# EAGLE board UCirKitUserStudy5-2 (EAGLE 7.3.0)
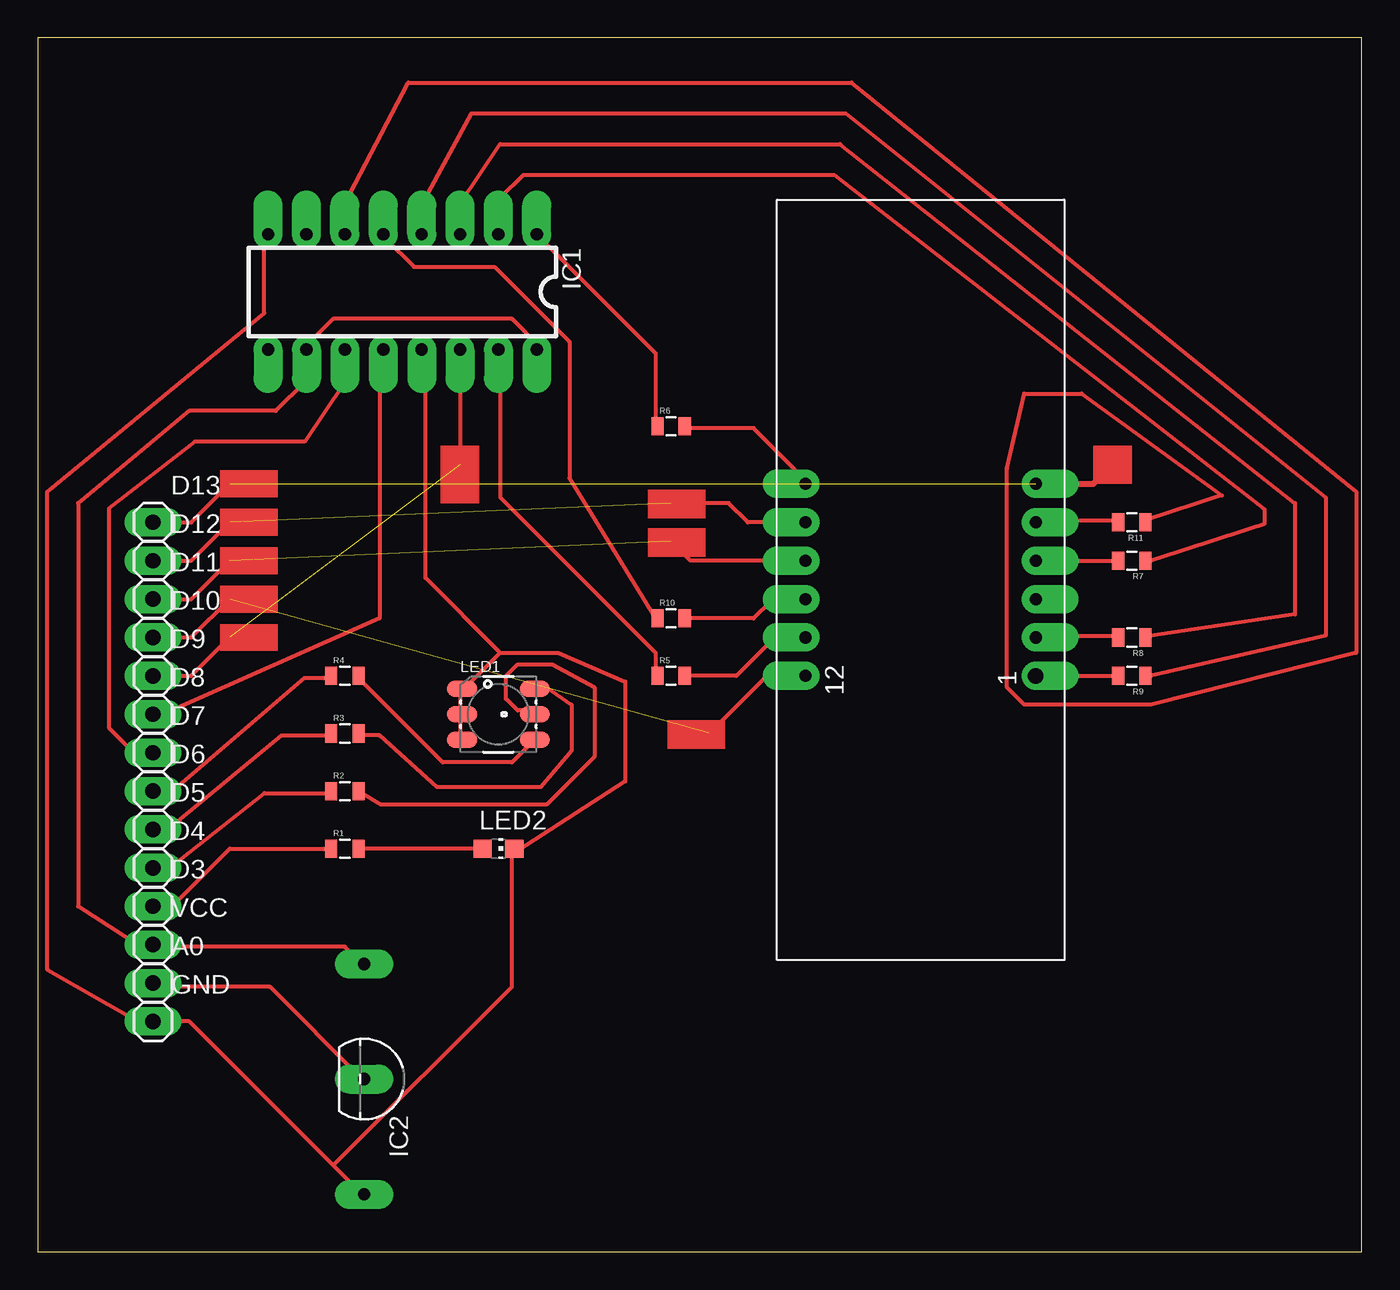
[diagram p0: board, top side]

Size 87.61 x 80.31 mm. Coordinates in mm from the lower left corner, seen from the top.
Outline: 0,0 87.61,0 87.61,80.31 0,80.31 0,0
Copper layers (1*16): Top 0.035mm / dielectric 1.5mm / Bottom 0.035mm
Design rules "default *": minimum track width 10mil, minimum drill 24mil, track to track 20mil, track to pad 30mil, pad to pad 9mil, via to via 9mil, smd to smd 8mil, copper to edge 40mil, drill to drill 8mil, minimum pad ring 10mil, minimum via ring 8mil, stop-mask expansion 4mil, vias tented up to drill 0mil, thermal gap 10mil

## Footprints (pad centres in the part's own frame; a part is rotated, then mirrored left to right if it is on the bottom)
1X01_OVAL_PIN = drill 1.016 pad 1.88 long: 1 0,0
DIL16-OVAL-PIN = drill 0.813 pad 1.93 offset: 1 -8.89,-3.81; 2 -6.35,-3.81; 3 -3.81,-3.81; 4 -1.27,-3.81; 5 1.27,-3.81; 6 3.81,-3.81; 7 6.35,-3.81; 8 8.89,-3.81; 9 8.89,3.81; 10 6.35,3.81; 11 3.81,3.81; 12 1.27,3.81; 13 -1.27,3.81; 14 -3.81,3.81; 15 -6.35,3.81; 16 -8.89,3.81
TO92-EXPANDED-OVAL-PIN = drill 0.813 pad 1.93 long: 1 -7.62,0; 2 0,0; 3 7.62,0
LED-TRICOLOR-5050 = smd 2 x 1.1: 1 -2.4,1.7; 2 -2.4,0; 3 -2.4,-1.7; 4 2.4,-1.7; 5 2.4,0; 6 2.4,1.7
CHIP-LED0805 = smd 1.2 x 1.2: A 0,-1.05; C 0,1.05
0805 = smd 0.8 x 1.2: 1 -0.9,0; 2 0.9,0
4DIGIT_SEVEN_SEGMENT_OVAL_PIN = drill 1.016 pad 1.88 offset: 1 -6.35,-7.62 | drill 0.8 pad 1.88 offset: 2 -3.81,-7.62; 3 -1.27,-7.62; 4 1.27,-7.62; 5 3.81,-7.62; 6 6.35,-7.62; 7 6.35,7.62; 8 3.81,7.62; 9 1.27,7.62; 10 -1.27,7.62; 11 -3.81,7.62; 12 -6.35,7.62

## Placement (x,y rotation side)
A0  [1X01_OVAL_PIN]  7.62,17.78 0 top
D3  [1X01_OVAL_PIN]  7.62,22.86 0 top
D4  [1X01_OVAL_PIN]  7.62,25.4 0 top
D5  [1X01_OVAL_PIN]  7.62,27.94 0 top
D6  [1X01_OVAL_PIN]  7.62,30.48 0 top
D7  [1X01_OVAL_PIN]  7.62,33.02 0 top
D8  [1X01_OVAL_PIN]  7.62,35.56 0 top
D9  [1X01_OVAL_PIN]  7.62,38.1 0 top
D10  [1X01_OVAL_PIN]  7.62,40.64 0 top
D11  [1X01_OVAL_PIN]  7.62,43.18 0 top
D12  [1X01_OVAL_PIN]  7.62,45.72 0 top
D13  [1X01_OVAL_PIN]  7.62,48.26 0 top
GND  [1X01_OVAL_PIN]  7.62,15.24 0 top
IC1  74595DIL16-OVAL-PIN  [DIL16-OVAL-PIN]  24.13,63.5 180 top
IC2  LM35TO92-EXPANDED-OVAL-PIN  [TO92-EXPANDED-OVAL-PIN]  21.59,11.43 270 top
LED1  LED-TRICOLOR-5050NO_IC  [LED-TRICOLOR-5050]  30.48,35.56 0 top
LED2  [CHIP-LED0805]  30.48,26.67 270 top
R1  0.3  [0805]  20.32,26.67 0 top
R2  0.3  [0805]  20.32,30.48 0 top
R3  0.3  [0805]  20.32,34.29 0 top
R4  0.3  [0805]  20.32,38.1 0 top
R5  0.3  [0805]  41.91,38.1 0 top
R6  0.3  [0805]  41.91,54.61 0 top
R7  0.3  [0805]  72.39,45.72 180 top
R8  0.3  [0805]  72.39,40.64 180 top
R9  0.3  [0805]  72.39,38.1 180 top
R10  0.3  [0805]  41.91,41.91 0 top
R11  0.3  [0805]  72.39,48.26 180 top
U$1  4DIGIT_SEVEN_SEGMENT4DIGIT_SEVEN_SEGMENT_OVAL_PIN  [4DIGIT_SEVEN_SEGMENT_OVAL_PIN]  58.42,44.45 90 top
VCC  [1X01_OVAL_PIN]  7.62,20.32 0 top

## Library data of the parts
A0 D3-D13 GND VCC = SparkFun-Connectors
IC1 = SparkFun-DigitalIC
IC2 = lm35
LED1 = SparkFun-LED
LED2 = led
R1-R11 = SparkFun-Resistors; PROD_ID: RES-11622
U$1 = led-7-segment

## Nets
A: IC1.15 R5.1
A0: A0.1 IC2.2
B: IC1.1 R6.1
C: IC1.2 R7.1
D: IC1.3 R8.1
D3: D3.1 R1.1
D4: D4.1 R2.1
D5: D5.1 R3.1
D6: D6.1 R4.1
D7: D7.1 IC1.11
D8: D8.1 IC1.12
D9: D9.1 IC1.14
D10: D10.1 U$1.12
D11: D11.1 U$1.9
D12: D12.1 U$1.8
D13: D13.1 U$1.6
E: IC1.4 R9.1
F: IC1.5 R10.1
G: IC1.6 R11.1
GND: GND.1 IC1.8 IC1.13 IC2.3 LED1.1 LED1.2 LED1.3 LED2.C
H: IC1.7
N$1: R5.2 U$1.11
N$2: R6.2 U$1.7
N$3: R7.2 U$1.4
N$4: R8.2 U$1.2
N$5: R9.2 U$1.1
N$6: R10.2 U$1.10
N$7: R11.2 U$1.5
N$8: LED1.5 R2.2
N$9: LED1.6 R3.2
N$10: LED1.4 R4.2
N$11: LED2.A R1.2
VCC: IC1.10 IC1.16 IC2.1 VCC.1

## Tracks (layer width: path | path; a pad name or v marks a point on that pad's centre or on a via)
A
  Top 0.254: R5.1 40.89,38.1 40.89,39.62 30.61,49.91 30.61,59.44 IC1.15
A0
  Top 0.254: A0.1 7.75,17.53 15.37,17.53 21.46,11.43 IC2.2
B
  Top 0.254: IC1.1 40.89,59.44 40.89,54.86 R6.1
C
  Top 0.254: R7.1 73.66,45.72 81.15,48.13 81.15,49.15 52.71,71.25 32.13,71.25 30.61,69.72 30.61,67.44 IC1.2
D
  Top 0.254: IC1.3 27.94,69.34 30.61,73.28 53.09,73.28 83.19,49.53 83.19,42.16 73.66,40.77 R8.1
D3
  Top 0.254: R1.1 12.7,26.67 8.89,22.86 D3.1
D4
  Top 0.254: R2.1 19.18,30.35 14.99,30.35 8.89,25.53 7.75,25.53 D4.1
D5
  Top 0.254: R3.1 19.18,34.16 16.13,34.16 8.89,28.19 7.75,28.19 D5.1
D6
  Top 0.254: D6.1 8.89,30.48 17.65,37.97 19.18,37.97 R4.1
D7
  Top 0.254: IC1.11 20.32,57.53 17.65,53.59 10.41,53.59 4.7,49.15 4.7,34.67 6.22,33.15 7.37,33.15 D7.1
D8
  Top 0.254: D8.1 7.75,35.81 8.89,35.81 22.61,41.91 22.61,59.44 IC1.12
D9  (1 unrouted)
  Top 0.254: D9.1 10.16,38.1 12.7,40.64 | IC1.14 27.94,52.07
D10  (1 unrouted)
  Top 0.254: D10.1 10.16,40.64 12.7,43.18 | U$1.12 48.26,38.1 44.45,34.29
D11  (1 unrouted)
  Top 0.254: D11.1 10.16,43.18 12.7,45.72 | U$1.9 43.18,45.72 41.91,46.99
D12  (1 unrouted)
  Top 0.254: D12.1 10.16,45.72 12.7,48.26 | U$1.8 46.99,48.26 45.72,49.53 41.91,49.53
D13  (1 unrouted)
  Top 0.254: D13.1 10.16,48.26 12.7,50.8
  Top 0.406: U$1.6 69.85,50.8 71.12,52.07
E
  Top 0.254: R9.1 73.66,38.1 85.22,40.77 85.22,49.91 53.47,75.31 28.7,75.31 25.65,69.72 25.65,67.44 IC1.4
F
  Top 0.254: R10.1 40.89,41.91 35.18,51.18 35.18,60.2 30.23,65.15 24.89,65.15 22.99,67.06 IC1.5
G
  Top 0.254: IC1.6 20.32,69.34 24.51,77.34 53.85,77.34 87.25,50.29 87.25,39.62 73.66,36.2 65.28,36.2 64.14,37.34 64.14,51.82 65.28,56.77 69.09,56.77 78.36,50.04 73.28,48.39 R11.1
GND
  Top 0.254: LED1.3 27.94,33.91 27.94,35.43 LED1.2 27.94,35.81 27.94,36.96 LED1.1 28.32,37.34 30.61,39.62 | 30.61,39.62 34.42,39.62 38.86,37.72 38.86,31.11 31.75,26.54 31.75,26.67 LED2.C 31.37,26.67 31.37,17.53 19.56,5.71 | 30.61,39.62 25.65,44.58 25.65,59.44 IC1.13 | 19.56,5.71 21.46,3.81 IC2.3 | 19.56,5.71 10.03,15.24 GND.1 6.6,15.24 0.64,18.67 0.64,50.29 14.99,62.1 14.99,67.06 IC1.8
N$1
  Top 0.254: R5.2 46.23,38.1 48.51,40.39 50.8,40.39 U$1.11
N$2
  Top 0.254: R6.2 43.18,54.48 47.37,54.48 50.8,51.05 U$1.7
N$3
  Top 0.254: U$1.4 R7.2
N$4
  Top 0.254: R8.2 71.37,40.77 66.04,40.77 U$1.2
N$5
  Top 0.254: U$1.1 R9.2
N$6
  Top 0.254: R10.2 47.37,41.91 48.51,43.05 50.8,43.05 U$1.10
N$7
  Top 0.254: R11.2 71.37,48.39 66.04,48.39 U$1.5
N$8
  Top 0.254: R2.2 21.46,30.35 22.73,29.59 33.66,29.59 36.83,32.77 36.83,37.34 34.04,38.86 31.75,38.86 30.99,38.1 30.99,36.58 31.75,35.81 32.51,35.81 LED1.5
N$9
  Top 0.254: R3.2 21.46,34.16 22.61,34.16 26.42,30.73 33.27,30.73 35.31,33.15 35.31,36.2 33.66,37.34 32.89,37.34 LED1.6
N$10
  Top 0.254: R4.2 21.46,37.97 21.46,37.72 26.8,32.38 31.37,32.38 32.51,33.53 LED1.4
N$11
  Top 0.254: LED2.A R1.2
VCC
  Top 0.254: IC2.1 21.46,19.05 20.32,20.19 7.75,20.19 VCC.1 7.37,20.57 6.22,20.57 2.67,22.86 2.67,49.53 10.03,55.63 15.75,55.63 17.65,57.53 17.65,59.44 IC1.10 18.03,59.82 18.03,60.2 19.56,61.72 31.37,61.72 33.27,59.82 IC1.16
(copper drawn outside any net)
  shapes: Top area x10